# Altium PCB Banker_VHDCI_2_EDGE.PCBDOC
Units mm, origin at the board's own origin, x right, y up, seen from the top; angles counter-clockwise.
Board outline 21.4 x 72.8 mm, 2 copper layers (Top, Bot), stack 1.571 mm thick; 11 components, 36 nets, 118 pads, 126 vias.
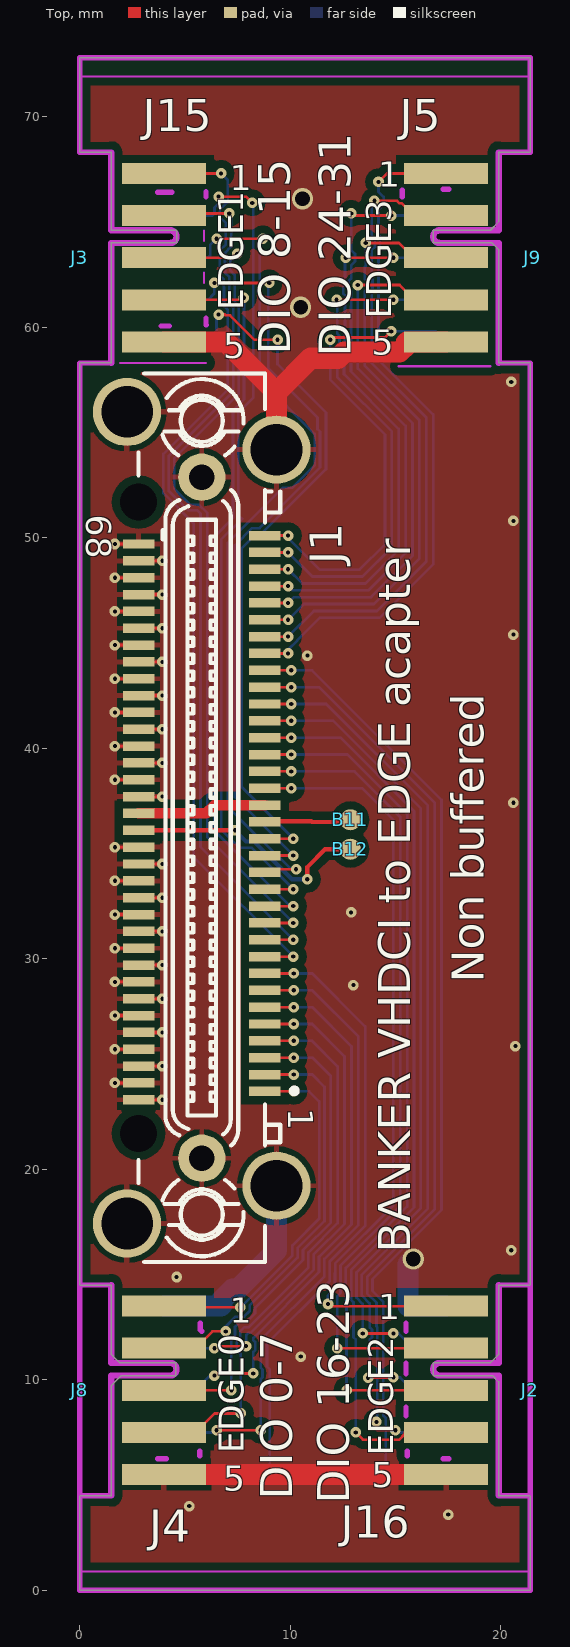
[diagram p0: Top view]
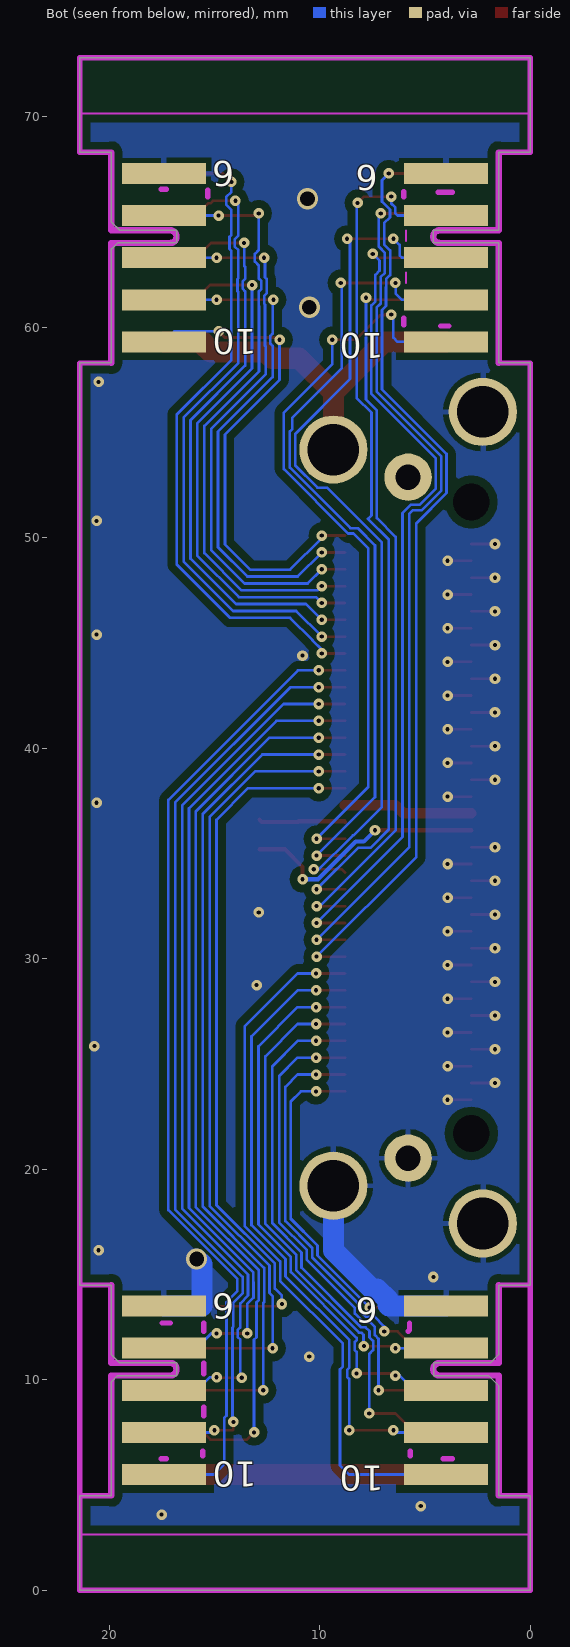
[diagram p1: Bot view, seen from below]

## Layer stack, top to bottom
TopSolder: solder mask 0.0102, Solder Resist, Dk 3.5
Top: signal copper 0.0356
Dielectric1: core 1.5, FR-4, Dk 4.8
Bot: signal copper 0.0356
BottomSolder: solder mask 0.0102, Solder Resist, Dk 3.5

## Board outline
0,0 0,4.5 1.5,4.5 1.5,9.725 1.975,10.2 4.572,10.2 4.572,10.8 1.9,10.8 1.5,11.2 1.5,14.5 0,14.5 0,58.3 1.5,58.3 1.5,64 4.6,64 4.6,64.6 1.5,64.6 1.5,68.3 0,68.3 0,72.8 21.4,72.8 21.4,68.3 19.9,68.3 19.9,65 19.5,64.6 16.8,64.6 16.8,64 19.6,64 19.8,63.8 19.9,63.7 19.9,58.3 21.4,58.3 21.4,14.5 19.9,14.5 19.9,11.2 19.5,10.8 16.8,10.8 16.8,10.2 19.6,10.2 19.9,9.9 19.9,4.5 21.4,4.5 21.4,0

## Design rules (kind name [scope] priority, off if disabled: settings)
Clearance Clearance_DIFF [(InDifferentialPairClass('All Differential Pairs'))] p1: gap=0.127 ignorepadtopadclearanceinfootprint=FALSE except(0: Arc-Hole Track-Hole SMDPad-Hole THPad-Hole Via-Hole Fill-Hole Poly-Hole Region-Hole Text-Hole; 0.254: Arc-Poly Track-Poly SMDPad-Poly THPad-Poly Via-Poly Fill-Poly Poly-Poly Poly-Region Poly-Text)
Clearance [All] p2: gap=0.127 ignorepadtopadclearanceinfootprint=FALSE except(0: Arc-Hole Track-Hole SMDPad-Hole THPad-Hole Via-Hole Fill-Hole Poly-Hole Region-Hole Text-Hole; 0.381: Arc-Poly Track-Poly SMDPad-Poly THPad-Poly Via-Poly Fill-Poly Poly-Poly)
DiffPairsRouting [All] p1: maxlimit=0.254 minlimit=0.127 mostfreqgap=0.127 toplayer_minwidth=0.127 toplayer_maxwidth=0.381 toplayer_prefwidth=0.254 bottomlayer_minwidth=0.127 bottomlayer_maxwidth=0.381 bottomlayer_prefwidth=0.254 maxuncoupledlength=12.7
FabricationTestPointUsage TestPointUsage [All] p1: valid=0 allowmultiple=FALSE
FabricationTestpoint Testpoint [All] p1: side=3 testpointundercomponent=TRUE minsize=1.016 maxsize=2.54 preferedsize=1.524 minholesize=0.508 maxholesize=1.016 preferedholesize=0.813 testpointgrid=0.025 allowsidetop=TRUE allowsidebottom=TRUE usegrid=TRUE gridtolerance=0
HoleSize [All] p1: absolutevalues=TRUE maxlimit=3.81 minlimit=0.025 maxpercent=80.000 minpercent=20.000
HoleToHoleClearance [All] p1: gap=0.025 allowstackedmicrovias=TRUE
MinimumSolderMaskSliver [All] p1: minsoldermaskwidth=0
PlaneClearance [All] p1: clearance=0.254
PlaneConnect [All] p1: planeconnectstyle=Direct reliefexpansion=0.508 reliefentries=4 reliefconductorwidth=0.254 reliefairgap=0.254
PolygonConnect PolygonConnect_pad [(InPadClass('All Pads'))] p1: connectstyle=Relief reliefconductorwidth=0.254 reliefentries=4 polygonreliefangle="90 Angle" airgapwidth=0.254
PolygonConnect [All] p2: connectstyle=Direct reliefconductorwidth=0.254 reliefentries=4 polygonreliefangle="45 Angle" airgapwidth=0.254
RoomDefinition Banker_VHDCI_2_EDGE [InComponentClass('Banker_VHDCI_2_EDGE')] p1 off: confinementstyle=ConfineIn formatcopy=TRUE lockcomponents=FALSE outline 65.65,12.65 248.399,12.65 248.399,36.4 65.65,36.4
RoutingVias [All] p1: holewidth=0.2 width=0.5 viastyle="Through Hole" minholewidth=0.2 minwidth=0.5 maxholewidth=0.8 maxwidth=1.3
SilkToSilkClearance [All] p1: silktosilkclearance=0
SilkToSolderMaskClearance SilkscreenOverComponentPads [IsPad] p1: minsilkscreentomaskgap=0 clearancetoexposedcopper=TRUE
SolderMaskExpansion [All] p1: expansion=0.051
Width [All] p1: maxlimit=1.27 minlimit=0.127 preferedwidth=0.127
20 further rules are at their usual default settings.

## Components (designator, comment, footprint, x,y, rotation, side; value= is the part's Value field where it differs from the comment)
B11 "SMD Pad" C100 12.86,36.6 r180 top
B12 "SMD Pad" C100 12.86,35.2 r180 top
J1 "VHDCI" MOLEX_73776-0201 5.8,36.7 r270 top
J2 "=Family" "AVX_00 9159 010 061 916" 21.4,9.5 r0 top
J3 "=Family" "AVX_00 9159 010 061 916" 0,63.3 r180 top
J4 "=Family" EDGE10T1B6_P200W1000L0F100X400 4,13.5 r270 top
J5 "=Family" EDGE10T5B10_P200W1000L0F100X400 17.4,59.3 r90 top
J8 "=Family" "AVX_00 9159 010 061 916" 0,9.5 r0 top
J9 "=Family" "AVX_00 9159 010 061 916" 21.527,63.3 r0 top
J15 "=Family" EDGE10T1B6_P200W1000L0F100X400 4,67.3 r270 top
J16 "=Family" EDGE10T5B10_P200W1000L0F100X400 17.4,5.5 r90 top

## Footprints (in the part's own frame and the unit in brackets; to place one, negate y for a bottom-side part, rotate by r counter-clockwise, add the part's x,y. Pads: shape width x height; smd on the part's side, far side on the other; paste and mask are expansions set on the pad)
"AVX_00 9159 010 061 916" [mm] "10 Contacts, 2mm Pitch, Open Ended Card Edge Connector, 9159 Series"
  body extent -5,-4.95 5,4.95, height 1.7
C100 [mm] "1mm Diameter SMD Pad"
  round 1 smd paste-1: 1(0,0)
EDGE10T1B6_P200W1000L0F100X400 [mm] "10 contacts Board Edge Connector, First Left Top Pad 1, First Left Bottom Pad 2, Pitch 2mm, Length 0mm, Width 10mm, Finger Lenght 4mm, Finger Width 1mm"
  rect 1x4 smd paste-0.5: 1(0,0) 2(2,0) 3(4,0) 4(6,0) 5(8,0)
  rect 1x4 smd far side paste-0.5: 6(0,0) 7(2,0) 8(4,0) 9(6,0) 10(8,0)
  KeepOutLayer lines w0.3: 9,-2.5 3.3,-2.5 3.3,0.3 ccw(c3,0.3) 2.7,0.3 2.7,-2.5 -1,-2.5
EDGE10T5B10_P200W1000L0F100X400 [mm] "10 contacts Board Edge Connector, First Left Top Pad 5, First Left Bottom Pad 10, Pitch 2mm, Length 0mm, Width 10mm, Finger Lenght 4mm, Finger Width 1mm"
  rect 1x4 smd paste-0.5: 1(8,0) 2(6,0) 3(4,0) 4(2,0) 5(0,0)
  rect 1x4 smd far side paste-0.5: 6(8,0) 7(6,0) 8(4,0) 9(2,0) 10(0,0)
  KeepOutLayer lines w0.3: -1,-2.5 4.7,-2.5 4.7,0.3 cw(c5,0.3) 5.3,0.3 5.3,-2.5 9,-2.5
MOLEX_73776-0201 [mm] "0.80mm Pitch, 68 Contacts, Ultra+ VHDCI Surface Mount Vertical Receptacle With Screwlock Kit"
  rect 0.45x1.5 smd: 1(13,3) 2(12.2,3) 3(11.4,3) 4(10.6,3) 5(9.8,3) 6(9,3) 7(8.2,3) 8(7.4,3) 9(6.6,3) 10(5.8,3) 11(5,3) 12(4.2,3) 13(3.4,3) 14(2.6,3) 15(1.8,3) 16(1,3) 17(0.2,3) 18(-0.6,3) 19(-1.4,3) 20(-2.2,3) 21(-3,3) 22(-3.8,3) 23(-4.6,3) 24(-5.4,3) 25(-6.2,3) 26(-7,3) 27(-7.8,3) 28(-8.6,3) 29(-9.4,3) 30(-10.2,3) 31(-11,3) 32(-11.8,3) 33(-12.6,3) 34(-13.4,3) 35(13.4,-3) 36(12.6,-3) 37(11.8,-3) 38(11,-3) 39(10.2,-3) 40(9.4,-3) 41(8.6,-3) 42(7.8,-3) 43(7,-3) 44(6.2,-3) 45(5.4,-3) 46(4.6,-3) 47(3.8,-3) 48(3,-3) 49(2.2,-3) 50(1.4,-3) 51(0.6,-3) 52(-0.2,-3) 53(-1,-3) 54(-1.8,-3) 55(-2.6,-3) 56(-3.4,-3) 57(-4.2,-3) 58(-5,-3) 59(-5.8,-3) 60(-6.6,-3) 61(-7.4,-3) 62(-8.2,-3) 63(-9,-3) 64(-9.8,-3) 65(-10.6,-3) 66(-11.4,-3) 67(-12.2,-3) 68(-13,-3)
  round 2.25 hole 1.2: 69(-16.175,0) 70(16.175,0)
  round 3.24 hole 2.45: 71(-19.275,-3.55) 72(-17.485,3.55) 73(19.275,-3.55) 74(17.485,3.55)
  round 0.5 hole 1.75 unplated mask+0.625: 75(-14.995,-3) 75(14.995,-3)
  silkscreen extent -21.1,-3 21.1,4.52, body extent -21.25,-3.73 21.25,3.73, height 10.7

## Part data
B11 B12: library part SMD_PAD_D1MM, "Through Hole Pad", Author="CERN DEM JLC", ComponentHeight=0mm, Component Type="Standard (No BOM)", CreateDate=10.10.2017, Family="SMD Pad", HelpURL=Undefined, LatestRevisionDate=10.10.2017, Mounted=No, PackageDescription="1mm Diameter SMD Pad", Part Description="1mm Diameter SMD Pad", Part Number=SMD_PAD_D1MM, Pin Count=1, Sense=No, SMD=No, Socket=No, Status=None
J1: library part MOLEX_73776-0201, "0.80mm Pitch, 68 Contacts, Ultra+ VHDCI Surface Mount Vertical Receptacle", Manufacturer=MOLEX, Manufacturer Part Number=73776-0201, Author="CERN DEM JLC", ComponentHeight=10.7mm, Component Type=Standard, CreateDate=14/01/2013, Family=VHDCI, HelpURL=\\cern.ch\dfs\Applications\Altium\Datasheets\MOLEX_73776-0201.pdf, LatestRevisionDate=14/01/2013, Mounted=Yes, Part Description="0.80mm Pitch, 68 Contacts, Ultra+ VHDCI Surface Mount Vertical Receptacle With Screwlock Kit", Part Number=MOLEX_73776-0201, Pin Count=74, PressFit=No, Sense=No, SMD=Yes, Socket=No, Status=None
J2 J3 J8 J9: library part "AVX_00 9159 010 061 916", "Open Ended Card Edge Connector, 9159 Series", Manufacturer=AVX, Manufacturer Part Number="00 9159 010 061 916", Author="CERN DEM MR", ComponentHeight=1.6mm, Component Type=Standard, CreateDate=13.02.2018, HelpURL="\\cern.ch\dfs\Applications\Altium\Datasheets\AVX_00 9159 010 061 916.pdf", LatestRevisionDate=13.02.2018, Mounted=Yes, Part Description="10 Contacts, 2mm Pitch, Open Ended Card Edge Connector, 9159 Series", Part Number="AVX_00 9159 010 061 916", Pin Count=10, PressFit=No, Sense=No, SMD=No, Socket=No, Status=None
J4 J15: library part EDGE10T1B6_P200W1000L0F100X400, "PCB Edge Connector 10 (2x5)", Author="CERN DEM MR", ComponentHeight=0mm, Component Type="Standard (No BOM)", CreateDate=14.02.2018, HelpURL=\\cern.ch\dfs\Applications\Altium\Datasheets\EDGE10T1B6_P200W1000L0F100X400.pdf, LatestRevisionDate=14.02.2018, Mounted=No, Part Description="10 Contacts Board Edge Connector, Pitch 2mm, Length 0mm, Width 10mm, Finger Lenght 4mm, Finger Width 1mm", Part Number=EDGE10T1B6_P200W1000L0F100X400, Pin Count=10, PressFit=No, Sense=No, SMD=No, Socket=No, Status=None
J5 J16: library part EDGE10T5B10_P200W1000L0F100X400, "PCB Edge Connector 10 (2x5)", Author="CERN DEM MR", ComponentHeight=0mm, Component Type="Standard (No BOM)", CreateDate=14.02.2018, HelpURL=\\cern.ch\dfs\Applications\Altium\Datasheets\EDGE10T5B10_P200W1000L0F100X400.pdf, LatestRevisionDate=14.02.2018, Mounted=No, Part Description="10 Contacts Board Edge Connector, Pitch 2mm, Length 0mm, Width 10mm, Finger Lenght 4mm, Finger Width 1mm", Part Number=EDGE10T5B10_P200W1000L0F100X400, Pin Count=10, PressFit=No, Sense=No, SMD=No, Socket=No, Status=None

## Via types
v1: diameter 0.5, hole 0.2, Top to Bot, 123 vias
v2: diameter 1, hole 0.7, Top to Bot, 3 vias

## Nets (pads, with @x,y where several pads share a name; then routed paths per layer and width w, separated by ;. In a path a pad name is that pad's centre, name@x,y a point inside that pad or via, vN(x,y) a via of type N, cw(c..) or ccw(c..) an arc to the next point about the centre after c; other vN are vias at no path point)
EDGE0_DIO0: J1.1 J4.1 | length 17.9
  Top w0.127: J4.1 4.061,13.439 v1(7.633,13.439) ; J1.1 v1(10.173,23.7)
  Bot w0.127: v1(7.633,13.439) 10.1,15.906 10.1,16.375 11.375,17.65 11.375,23.222 10.897,23.7 v1(10.173,23.7) v1@10.173,23.865
EDGE0_DIO1: J1.2 J4.2 | length 20.3
  Top w0.127: J4.2@4.14,11.64 J4.2 5.5,11.5 6.3,12.3 v1(6.938,12.3) ; J1.2 v1(10.173,24.5)
  Bot w0.127: v1(6.938,12.3) 6.938,12.538 7.398,12.998 7.815,12.998 8.073,13.256 8.073,13.52 10.354,15.801 10.354,16.259 11.629,17.534 11.629,23.917 11.046,24.5 v1(10.173,24.5)
EDGE0_DIO2: J1.3 J4.3 | length 24
  Top w0.127: J4.3@4.14,9.64 J4.3 v1(7.205,9.5) ; J1.3 v1(10.173,25.3)
  Bot w0.127: v1(7.205,9.5) 7.205,11.945 7.379,12.118 7.379,12.516 7.607,12.744 7.92,12.744 8.327,13.151 8.327,13.415 10.608,15.696 10.608,16.154 11.927,17.473 11.927,24.419 11.046,25.3 v1(10.173,25.3)
EDGE0_DIO3: J1.4 J4.4 | length 26.7
  Top w0.127: J4.4 5.5,7.5 6.4,8.4 v1(7.646,8.4) ; J1.4 v1(10.173,26.1)
  Bot w0.127: v1(7.646,8.4) 7.646,11.231 7.459,11.418 7.459,11.839 7.633,12.012 7.633,12.308 7.815,12.49 8.025,12.49 10.861,15.326 10.861,15.59 10.862,16.049 12.254,17.441 12.254,24.892 11.046,26.1 v1(10.173,26.1)
EDGE0_DIO4: J1.5 J4.7 | length 24.1
  Top w0.127: v1(6.4,11.5) 6.5,11.6 v1(7.9,11.6) ; J1.5 v1(10.173,26.9)
  Bot w0.127: J4.7 v1(6.4,11.5) ; v1@7.919,11.6 7.919,12.132 8.024,12.236 8.131,12.236 11.115,15.221 11.115,15.485 11.116,15.944 12.581,17.409 12.581,25.365 11.046,26.9 v1(10.173,26.9)
EDGE0_DIO5: J1.6 J4.8 | length 27
  Top w0.127: v1(6.4,10.2) 6.5,10.3 v1(8.246,10.3) ; J1.6 v1(10.173,27.7)
  Bot w0.127: J4.8 5.5,9.5 6.2,10.2 v1(6.4,10.2) ; v1(8.246,10.3) 8.246,11.323 8.34,11.418 8.34,11.782 8.246,11.877 8.246,11.993 11.369,15.116 11.369,15.38 ; v1(10.173,27.7) 11.046,27.7 12.908,25.838 12.908,17.377 11.37,15.839 11.37,15.38
EDGE0_DIO6: J1.7 J4.9 | length 30.7
  Top w0.127: v1(6.5,7.6) v1(8.594,7.6) ; J1.7 v1(10.173,28.5)
  Bot w0.127: J4.9 6.4,7.5 v1(6.5,7.6) ; v1(8.594,7.6) 8.594,10.026 8.687,10.118 8.687,10.482 8.594,10.574 8.594,11.882 11.623,14.911 11.623,15.275 ; v1(10.173,28.5) 11.046,28.5 13.235,26.311 13.235,17.344 11.624,15.733 11.624,15.275
EDGE0_DIO7: J1.8 J4.10 | length 33.9
  Top w0.127: J1.8 v1(10.173,29.3)
  Bot w0.127: J4.10 8.6,5.5 9.035,5.935 9.035,10.493 8.9,10.628 8.9,11.725 11.877,14.703 11.877,15.169 11.878,15.628 13.562,17.312 13.562,26.784 11.046,29.3 v1(10.173,29.3) v1@10.173,29.208
EDGE1_DIO0: J1.9 J15.1 | length 45.8
  Top w0.127: J15.1 v1(6.719,67.3) ; J1.9 v1(10.146,30.1)
  Bot w0.127: v1(6.719,67.3) 7.04,66.978 7.04,65.963 6.66,65.582 6.66,65.218 6.94,64.937 6.94,63.927 6.652,63.638 6.652,62.471 6.84,62.282 6.84,61.917 6.851,61.906 6.851,61.007 7.04,60.818 7.04,57.044 3.976,53.98 3.976,52.12 5.411,50.685 5.411,34.835 v1(10.146,30.1)
EDGE1_DIO1: J1.10 J15.2 | length 43.3
  Top w0.127: J15.2 4.1,65.4 v1(7.1,65.4) ; J1.10 v1(10.146,30.9)
  Bot w0.127: v1(7.1,65.4) 7.194,65.306 7.194,63.822 6.906,63.533 6.906,62.577 7.105,62.377 7.105,61.112 7.294,60.923 7.294,56.939 4.23,53.875 4.23,52.225 5.15,51.305 5.572,51.305 5.738,51.14 5.738,35.308 v1(10.146,30.9)
EDGE1_DIO2: J1.11 J15.3 | length 40.8
  Top w0.127: J15.3 7.296,63.3 v1(7.475,63.479) ; J1.11 v1(10.146,31.7)
  Bot w0.127: v1(7.475,63.479) 7.16,63.164 7.16,62.682 7.359,62.482 7.359,61.217 7.548,61.028 7.548,56.834 4.484,53.77 4.484,52.33 5.255,51.559 5.678,51.559 6.065,51.172 6.065,35.781 v1(10.146,31.7)
EDGE1_DIO3: J1.12 J15.4 | length 36.3
  Top w0.127: J15.4 7.7,61.3 v1(7.8,61.4) ; J1.12 v1(10.146,32.5)
  Bot w0.127: v1(7.8,61.4) 7.802,61.397 7.802,56.563 7.286,56.046 7.286,50.935 6.392,50.042 6.392,36.099 9.991,32.5 v1(10.146,32.5)
EDGE1_DIO4: J1.13 J15.7 | length 41.5
  Top w0.127: v1(6.6,66.2) 7.9,66.2 v1(8.2,65.9) ; J1.13 v1(10.146,33.3)
  Bot w0.127: J15.7 6.3,65.3 6.406,65.406 6.406,65.688 6.6,65.882 v1(6.6,66.2) ; v1(8.2,65.9) 8.24,65.86 8.24,56.64 7.54,55.94 7.54,51.061 7.706,50.894 6.719,49.906 6.719,36.131 7.571,35.279 8.167,35.279 v1(10.146,33.3)
EDGE1_DIO5: J1.14 J15.8 | length 41.6
  Top w0.127: v1(6.5,64.2) v1(8.7,64.2) ; J1.14 8.954,34.254 v1(10.277,34.254)
  Bot w0.127: J15.8 6.1,63.3 6.2,63.4 6.2,63.9 v1(6.5,64.2) ; v1(8.7,64.2) 8.56,64.06 8.56,57.536 11.161,54.935 11.161,53.435 10.1,52.374 9.65,52.374 7.046,49.771 7.046,37.2 8.386,35.86 8.42,35.86 10.146,34.134 10.266,34.254 v1(10.277,34.254)
EDGE1_DIO6: J1.15 J15.9 | length 38.4
  Top w0.127: v1(6.4,62.1) 6.3,62.1 v1(9,62.1) ; J1.15 v1(10.146,34.9)
  Bot w0.127: J15.9 6.1,61.3 6.392,61.592 6.392,62.092 v1(6.4,62.1) ; v1(9,62.1) 8.959,62.059 8.959,58.041 11.3,55.7 11.3,55.155 11.415,55.04 11.415,53.33 8.539,50.454 8.192,50.454 7.373,49.635 7.373,37.673 v1(10.146,34.9)
EDGE1_DIO7: J1.16 J15.10 | length 35.8
  Top w0.127: v1(6.6,60.6) 6.895,60.6 6.931,60.563 7.137,60.563 8.3,59.4 v1(9.4,59.4) ; J1.16 v1(10.146,35.7)
  Bot w0.127: J15.10 6.3,59.3 6.5,59.5 6.5,60.5 v1(6.6,60.6) ; v1(9.4,59.4) 9.4,58.24 11.7,55.94 11.7,53.254 8.646,50.2 8.4,50.2 7.7,49.5 7.7,38.146 v1(10.146,35.7)
EDGE2_DIO0: J1.19 J16.1 | length 36.7
  Top w0.127: J1.19 v1(10.046,38.1) ; v1(11.795,13.6) 11.895,13.5 J16.1
  Bot w0.127: v1(10.046,38.1) 13.4,38.1 14.9,36.6 14.9,18.291 12.132,15.523 12.132,15.065 12.131,14.332 11.795,13.995 v1(11.795,13.6)
EDGE2_DIO1: J1.20 J16.2 | length 39
  Top w0.127: J1.20 v1(10.046,38.9) ; v1(12.236,11.5) J16.2
  Bot w0.127: v1(10.046,38.9) 13.063,38.9 15.227,36.735 15.227,18.259 12.386,15.418 12.386,14.959 12.385,14.123 12.236,13.973 v1(12.236,11.5)
EDGE2_DIO2: J1.21 J16.3 | length 41.2
  Top w0.127: J1.21 v1(10.046,39.7) ; v1(12.676,9.5) J16.3
  Bot w0.127: v1(10.046,39.7) 12.725,39.7 15.554,36.871 15.554,18.227 12.64,15.313 12.64,14.854 12.639,13.688 12.676,13.651 v1(12.676,9.5)
EDGE2_DIO3: J1.22 J16.4 | length 44
  Top w0.127: J1.22 v1(10.046,40.5) ; v1(13.117,7.5) 13.457,7.16 15.182,7.16 15.44,7.418 15.44,7.5 J16.4
  Bot w0.127: v1(10.046,40.5) 12.387,40.5 15.881,37.006 15.881,18.194 12.894,15.207 12.894,14.749 ; 12.893,14.749 12.893,13.793 13.003,13.683 13.003,12.018 13.117,11.904 v1(13.117,7.5)
EDGE2_DIO4: J1.23 J16.7 | length 39.7
  Top w0.127: J1.23 v1(10.046,41.3) ; v1(13.444,12.2) v1(14.9,12.2)
  Bot w0.127: v1(10.046,41.3) 12.05,41.3 16.208,37.142 16.208,18.162 13.148,15.102 13.148,14.644 ; 13.147,14.643 13.147,13.898 13.444,13.602 v1(13.444,12.2) ; v1(14.9,12.2) 15.151,12.2 ; 15.151,12.2 15.851,11.5 J16.7
EDGE2_DIO5: J1.24 J16.8 | length 42.4
  Top w0.127: J1.24 v1(10.046,42.1) ; v1(13.7,10.1) 14.882,10.1 v1(14.9,10.118)
  Bot w0.127: v1(10.046,42.1) 11.712,42.1 16.535,37.277 16.535,18.13 13.402,14.997 13.402,14.539 ; 13.401,14.538 13.401,14.004 13.771,13.634 13.771,12.496 13.884,12.382 13.884,12.018 13.771,11.904 v1@13.771,10.1 ; v1(14.9,10.118) 15.225,10.118 15.843,9.5 J16.8
EDGE2_DIO6: J1.25 J16.9 | length 45
  Top w0.127: J1.25 v1(10.046,42.9) ; v1(14.098,8) 14.098,7.643 14.141,7.6 v1(15,7.6)
  Bot w0.127: v1(10.046,42.9) 11.375,42.9 16.862,37.413 16.862,18.098 13.656,14.892 13.656,14.433 13.655,14.109 14.098,13.666 14.098,12.528 14.141,12.486 v1@14.141,8 ; v1(15,7.6) 15.1,7.5 J16.9
EDGE2_DIO7: J1.26 J16.10 | length 47.2
  Top w0.127: J1.26 v1(10.046,43.7)
  Bot w0.127: v1(10.046,43.7) 11.037,43.7 17.189,37.548 17.189,18.066 13.91,14.787 13.91,14.328 13.909,14.214 14.425,13.699 14.425,8.296 14.538,8.182 14.538,5.987 15.025,5.5 J16.10
EDGE3_DIO0: J1.27 J5.1 | length 32.7
  Top w0.127: J1.27 v1(9.9,44.5) ; v1(14.194,66.9) 14.594,67.3 J5.1
  Bot w0.127: v1(9.9,44.5) 9.9,44.677 10.341,45.117 10.341,45.132 11.4,46.192 14.248,46.192 16.789,48.733 16.789,55.848 14.194,58.443 14.194,63.623 14.283,63.712 14.283,64.288 14.194,64.377 14.194,65.571 14.44,65.817 14.44,66.182 14.194,66.429 v1(14.194,66.9)
EDGE3_DIO1: J1.28 J5.2 | length 31.3
  Top w0.127: J1.28 v1(9.9,45.3) ; v1(14,66) 15.074,66 15.191,65.882 15.3,65.882 15.5,65.683 15.5,65.583 15.783,65.3 J5.2
  Bot w0.127: v1(9.9,45.3) 11.119,46.519 14.113,46.519 16.462,48.868 16.462,55.713 13.867,58.308 13.867,61.672 13.907,61.712 13.907,62.288 13.867,62.328 13.867,63.655 14.029,63.818 14.029,64.182 13.867,64.345 13.867,65.867 v1(14,66)
EDGE3_DIO2: J1.29 J5.3 | length 28.8
  Top w0.127: J1.29 v1(9.9,46.1) ; v1(13.589,64) 15.158,64 15.858,63.3 J5.3
  Bot w0.127: v1(9.9,46.1) 10.646,46.846 13.977,46.846 16.135,49.004 16.135,55.577 13.54,58.173 13.54,61.704 13.653,61.818 13.653,62.182 13.54,62.296 13.54,62.858 13.589,62.907 v1(13.589,64)
EDGE3_DIO3: J1.30 J5.4 | length 26.3
  Top w0.127: J1.30 v1(9.9,46.9) ; v1(13.213,62) 15.2,62 15.9,61.3 J5.4
  Bot w0.127: v1(9.9,46.9) 10.173,47.173 13.842,47.173 15.808,49.139 15.808,55.442 13.213,58.037 v1(13.213,62)
EDGE3_DIO4: J1.31 J5.7 | length 29.5
  Top w0.127: J1.31 v1(9.9,47.7) ; v1(12.895,65.4) 12.995,65.3 v1(14.8,65.3)
  Bot w0.127: v1(9.9,47.7) 10.1,47.5 13.706,47.5 15.481,49.275 15.481,55.306 12.886,57.902 12.886,61.004 12.895,61.012 12.895,61.695 12.772,61.818 12.772,62.182 12.895,62.305 12.895,62.931 13.081,63.118 13.081,63.482 12.895,63.669 v1(12.895,65.4) ; v1(14.8,65.3) J5.7
EDGE3_DIO5: J1.32 J5.8 | length 27.2
  Top w0.127: J1.32 v1(9.9,48.5) ; v1(12.641,63.3) v1(14.9,63.3)
  Bot w0.127: v1(9.9,48.5) 10.573,47.827 13.571,47.827 15.154,49.41 15.154,55.171 12.559,57.766 12.559,59.072 12.599,59.112 12.599,61.076 12.641,61.118 12.641,61.482 12.518,61.605 12.518,62.288 12.599,62.369 12.599,63.3 v1(12.641,63.3) ; v1(14.9,63.3) J5.8
EDGE3_DIO6: J1.33 J5.9 | length 25.2
  Top w0.127: J1.33 v1(9.9,49.3) ; v1(12.2,61.3) v1(14.9,61.3)
  Bot w0.127: v1(9.9,49.3) 11.046,48.154 13.435,48.154 14.827,49.545 14.827,55.035 12.232,57.631 12.232,59.104 12.345,59.218 12.345,59.582 12.232,59.696 v1@12.232,61.3 ; v1(14.9,61.3) J5.9
EDGE3_DIO7: J1.34 J5.10 | length 23.6
  Top w0.127: J1.34 v1(9.9,50.1) ; v1(11.905,59.4) 12.015,59.51 14.51,59.51 v1(14.8,59.8)
  Bot w0.127: v1(9.9,50.1) 9.9,49.981 11.4,48.481 13.3,48.481 14.5,49.681 14.5,54.9 11.905,57.495 v1(11.905,59.4) ; v1(14.8,59.8) 16.9,59.8 J5.10
GND: J1.35 J1.36 J1.37 J1.38 J1.39 J1.40 J1.41 J1.42 J1.43 J1.44 J1.45 J1.46 J1.47 J1.48 J1.49 J1.50 J1.53 J1.54 J1.55 J1.56 J1.57 J1.58 J1.59 J1.60 J1.61 J1.62 J1.63 J1.64 J1.65 J1.66 J1.67 J1.68 J1.69 J1.70 J1.71 J1.72 J1.73 J1.74 J4.5 J4.6 J5.5 J5.6 J15.5 J15.6 J16.5 J16.6 | length 81.4
  Top w0.127: v1(1.673,24.1) 1.897,24.1 J1.36 ; v1(1.673,25.7) 1.897,25.7 J1.38 ; v1(1.673,27.3) 1.897,27.3 J1.40 ; v1(1.673,28.9) 1.897,28.9 J1.42 ; v1(1.673,30.5) 1.897,30.5 J1.44 ; v1(1.673,32.1) 1.897,32.1 J1.46 ; v1(1.673,33.7) 1.897,33.7 J1.48 ; v1(1.673,35.3) 1.897,35.3 J1.50 ; v1(1.673,38.5) 1.897,38.5 J1.54 ; v1(1.673,40.1) 1.897,40.1 J1.56 ; v1(1.673,41.7) 1.897,41.7 J1.58 ; v1(1.673,43.3) 1.897,43.3 J1.60 ; v1(1.673,44.9) 1.897,44.9 J1.62 ; v1(1.673,46.5) 1.897,46.5 J1.64 ; v1(1.673,48.1) 1.897,48.1 J1.66 ; v1(1.673,49.7) 1.897,49.7 J1.68 ; J1.35 3.703,23.3 v1(3.927,23.3) ; J1.37 3.703,24.9 v1(3.927,24.9) ; J1.39 v1(3.927,26.5) ; J1.41 v1(3.927,28.1) ; J1.43 3.703,29.7 v1(3.927,29.7) ; J1.45 3.703,31.3 v1(3.927,31.3) ; J1.47 3.703,32.9 v1(3.927,32.9) ; J1.49 3.703,34.5 v1(3.927,34.5) ; J1.53 3.703,37.7 v1(3.927,37.7) ; J1.55 3.703,39.3 v1(3.927,39.3) ; J1.57 3.703,40.9 v1(3.927,40.9) ; J1.59 3.703,42.5 v1(3.927,42.5) ; J1.61 3.703,44.1 v1(3.927,44.1) ; J1.63 3.703,45.7 v1(3.927,45.7) ; J1.65 3.703,47.3 v1(3.927,47.3) ; J1.67 3.703,48.9 v1(3.927,48.9)
  Top w1: J4.5 J16.5 ; J15.5 6.948,59.3 9.35,56.898 ; J1.72 9.35,56.898 ; J5.5 15.54,59.3 15.491,59.25 15.491,59.114 15.196,58.819 12.564,58.819 12.268,58.523 10.975,58.523 9.35,56.898
  Bot w1: J4.6 6.706,13.5 6.756,13.55 6.756,13.802 7.269,14.316 7.522,14.316 9.35,16.144 J1.74 ; v2(15.845,15.733) 15.6,15.488 15.6,13.5 J16.6
  other v1: 17.509,3.6 5.2,4 10.5,11.1 4.6,14.883 20.5,16.154 20.7,25.854 13,28.746 12.893,32.2 20.6,37.413 10.816,44.4 20.6,45.4 20.6,50.799 20.5,57.4
  other v2: 10.494,60.945 10.58,66.1
P5V0_VHDCI1: J1.18 J1.52 | length 6.2
  Top w0.5: J1.52 6,36.9 6.4,37.3 J1.18
VHDCI1_SCL: B11.1 J1.17 | length 4.1
  Top w0.2: J1.17 8.827,36.527 10.998,36.527 11.025,36.5 12.759,36.5 B11.1
VHDCI1_SDA: B12.1 J1.51 | length 12
  Top w0.2: J1.51 v1(7.373,36.1) ; v1(10.814,33.777) 10.814,34.364 11.65,35.2 B12.1
  Bot w0.2: v1(7.373,36.1) 7.904,35.569 8.288,35.569 10.08,33.777 v1(10.814,33.777)
pads on no net: J1.75

## Polygon pours and split planes (outlines as drawn)
GND on Top "Top-GND" (solid, remove dead copper, pour order 4): 0,72.8 21.4,72.8 21.4,1 21.3,0.9 0,0.9
GND on Bot "Bot-GND" (solid, remove dead copper, pour order 6): 0,70.15 21.4,70.15 21.4,2.65 0,2.65

## Keep-outs
Top:
  lines w0.1: 0,0.9 21.3,0.9 ; 0,71.9 21.4,71.9 ; 1.912,58.3 6.008,58.3 ; 15.158,58.142 19.519,58.142
Bot:
  lines w0.1: 0,2.65 21.4,2.65 ; 0,70.15 21.4,70.15
  lines w0.254: 17.1,12.7 17.481,12.7
KeepOutLayer:
  lines w0.1: 5.9,62.1 5.9,62.6 ; 5.9,64.1 5.9,64.6
  lines w0.254: 0,0.35 0,0 ; 0,14.5 1.5,14.5 ; 0.1,4.5 1.5,4.5 ; 1.5,58.3 0,58.3 0,43.8 0,0.15 ; 1.5,68.3 0,68.3 0,72.8 21.4,72.8 21.4,68.3 19.9,68.3 ; 3.704,6.254 4.127,6.254 ; 3.703,66.4 4.375,66.4 ; 3.873,60.054 4.254,60.054 ; 5.7,6.4 5.7,6.619 ; 5.734,12.7 5.734,12.366 5.8,12.3 ; 6,60.419 6,60.108 6.008,60.1 ; 6,66.181 6,66.446 ; 15.323,66.2 15.323,66.5 ; 15.5,8.3 15.5,8.7 ; 15.5,10.292 15.5,10.8 ; 15.5,12.3 15.5,12.7 ; 15.554,6.4 15.554,6.619 ; 17.273,6.254 17.527,6.254 ; 17.273,66.546 17.527,66.546 ; 19.9,4.5 21.35,4.5 ; 19.9,14.5 21.3,14.5 ; 19.9,58.3 21.4,58.3 21.4,0 0,0 ; 0,0 0,0.15 ; 0,0.15 0,0.15

## Silkscreen, mask and mechanical layers (free items; w line width, h text height)
TopOverlay:
  text "EDGE1" at 7.781,60.8 h1.2 r90
  text "EDGE3" at 14.8,60.4 h1.2 r90
  text "DIO 8-15" at 10,58.7 h1.52 r90
  text "DIO 24-31" at 12.886,58.6 h1.52 r90
  text "Non buffered" at 19.2,28.85 h1.52 r90
  text "BANKER VHDCI to EDGE acapter" at 15.697,16.023 h1.52 r90
  text "EDGE0" at 7.802,6.5 h1.2 r90
  text "EDGE2" at 14.9,6.4 h1.2 r90
  text "DIO 0-7" at 10.1,4.3 h1.52 r90
  text "DIO 16-23" at 12.8,4.1 h1.52 r90
Mechanical1:
  lines w0.2: 0,14.5 0,14.5
  lines w0.254: 0,0 0,4.5 1.5,4.5 1.5,9.725 1.975,10.2 4.572,10.2 4.572,10.8 1.9,10.8 1.5,11.2 1.5,14.5 0,14.5 0,58.3 1.5,58.3 1.5,64 4.6,64 4.6,64.6 1.5,64.6 1.5,68.3 0,68.3 0,72.8 21.4,72.8 21.4,68.3 19.9,68.3 19.9,65 19.5,64.6 16.8,64.6 16.8,64 19.6,64 19.8,63.8 19.9,63.7 19.9,58.3 21.4,58.3 21.4,14.5 19.9,14.5 19.9,11.2 19.5,10.8 16.8,10.8 16.8,10.2 19.6,10.2 19.9,9.9 19.9,4.5 21.4,4.5 21.4,0 0,0

## Text inside footprints (layer, text, board x,y; h text height)
J1: TopOverlay "68" at 0.3,51.1 h1.2 r270; TopOverlay "1" at 9.9,22.9 h1.2 r270; Mechanical14 "68" at 0.3,51.1 h1.2 r270; Mechanical14 "1" at 9.9,22.9 h1.2 r270
J4: TopOverlay "1" at 7.125,12.7 h1.2; TopOverlay "5" at 6.825,4.72 h1.2; BottomOverlay "6" at 7.25,13.9 h1.2 r180; BottomOverlay "10" at 6.95,5.92 h1.2 r180
J5: TopOverlay "5" at 13.875,58.7 h1.2; TopOverlay "1" at 14.175,66.68 h1.2; BottomOverlay "10" at 13,59.9 h1.2 r180; BottomOverlay "6" at 14.05,67.88 h1.2 r180
J15: TopOverlay "1" at 7.125,66.5 h1.2; TopOverlay "5" at 6.825,58.52 h1.2; BottomOverlay "6" at 7.25,67.7 h1.2 r180; BottomOverlay "10" at 6.95,59.72 h1.2 r180
J16: TopOverlay "5" at 13.875,4.9 h1.2; TopOverlay "1" at 14.175,12.88 h1.2; BottomOverlay "10" at 13,6.1 h1.2 r180; BottomOverlay "6" at 14.05,14.08 h1.2 r180